# Altium PCB LR1121EVM.PcbDoc
Units mm, origin at the board's own origin, x right, y up, seen from the top; angles counter-clockwise.
Board outline 90 x 62 mm, 2 copper layers (Top Layer, Bottom Layer), stack 1.571 mm thick; 50 components, 49 nets, 232 pads, 447 vias.
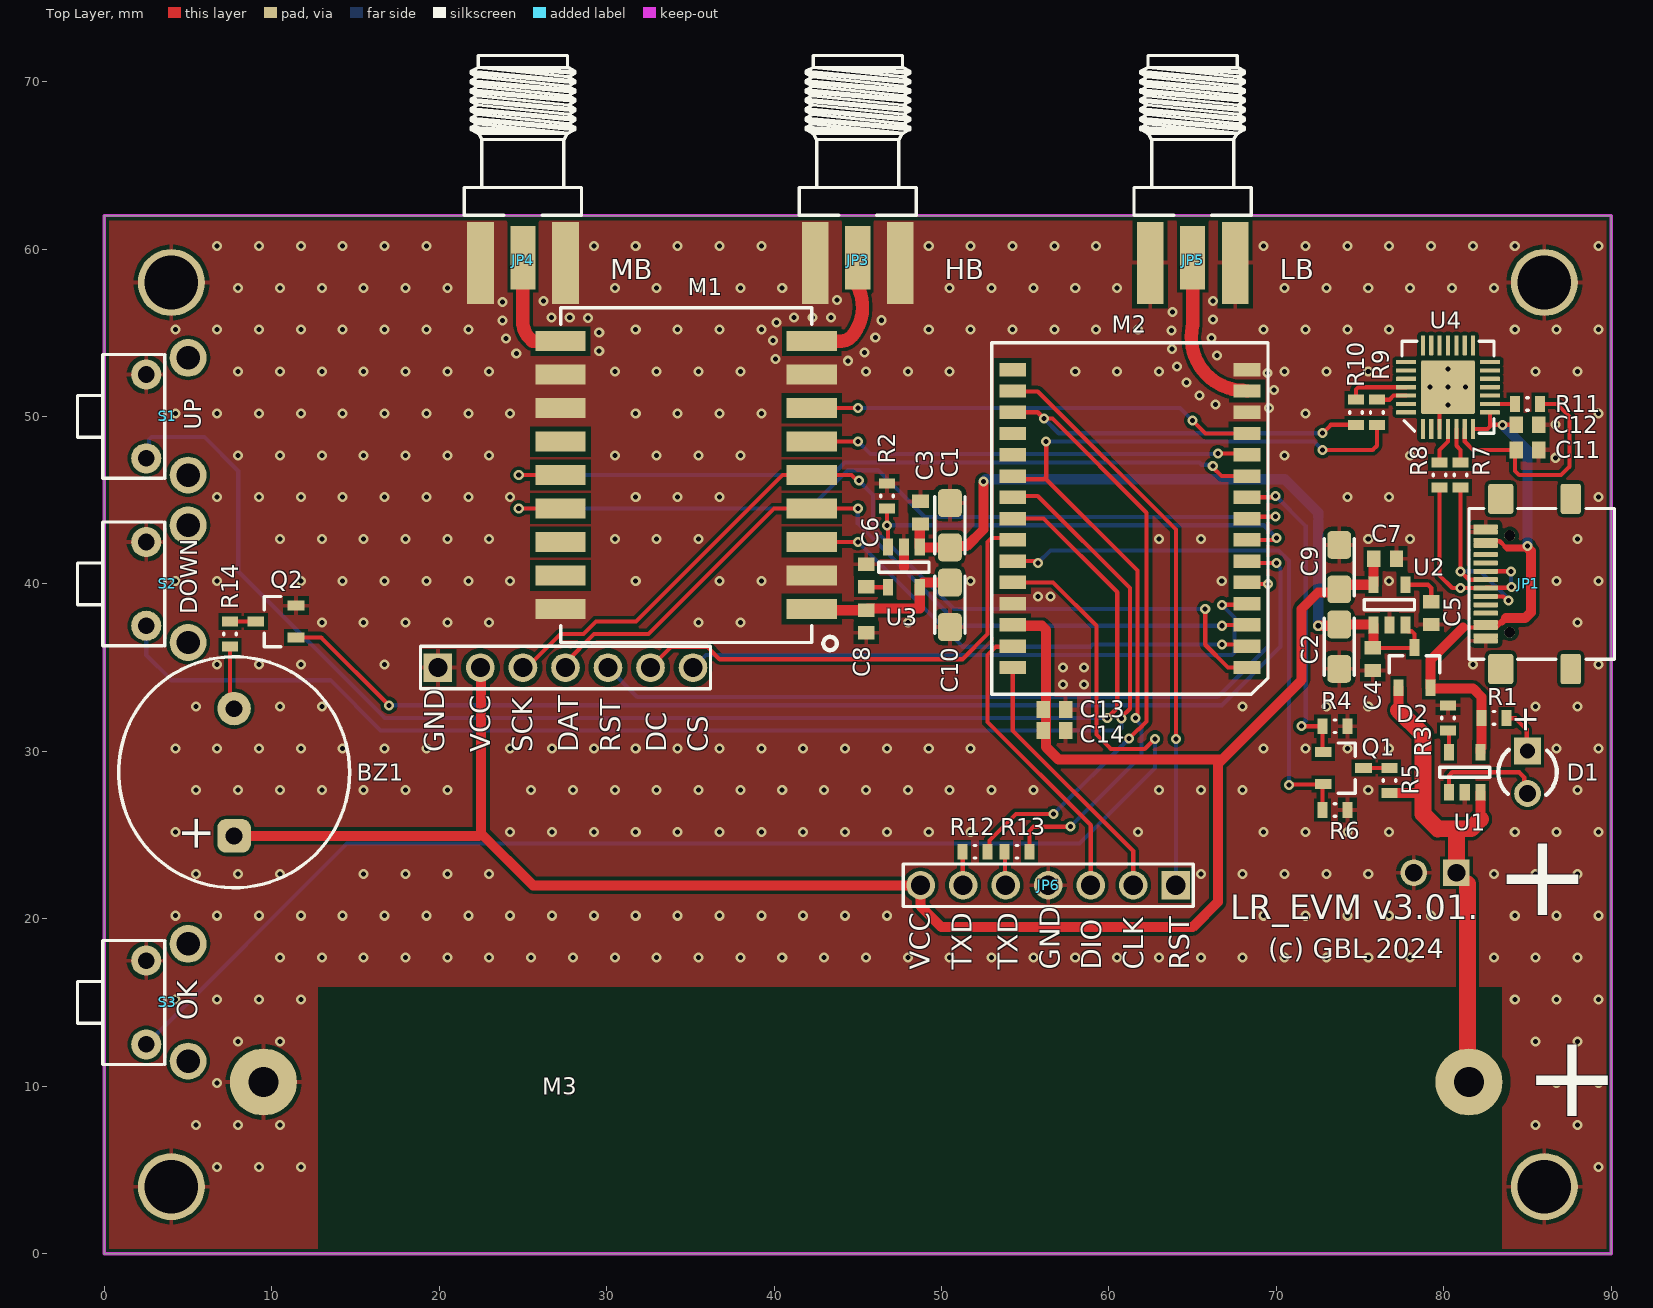
[diagram p0: Top Layer view]
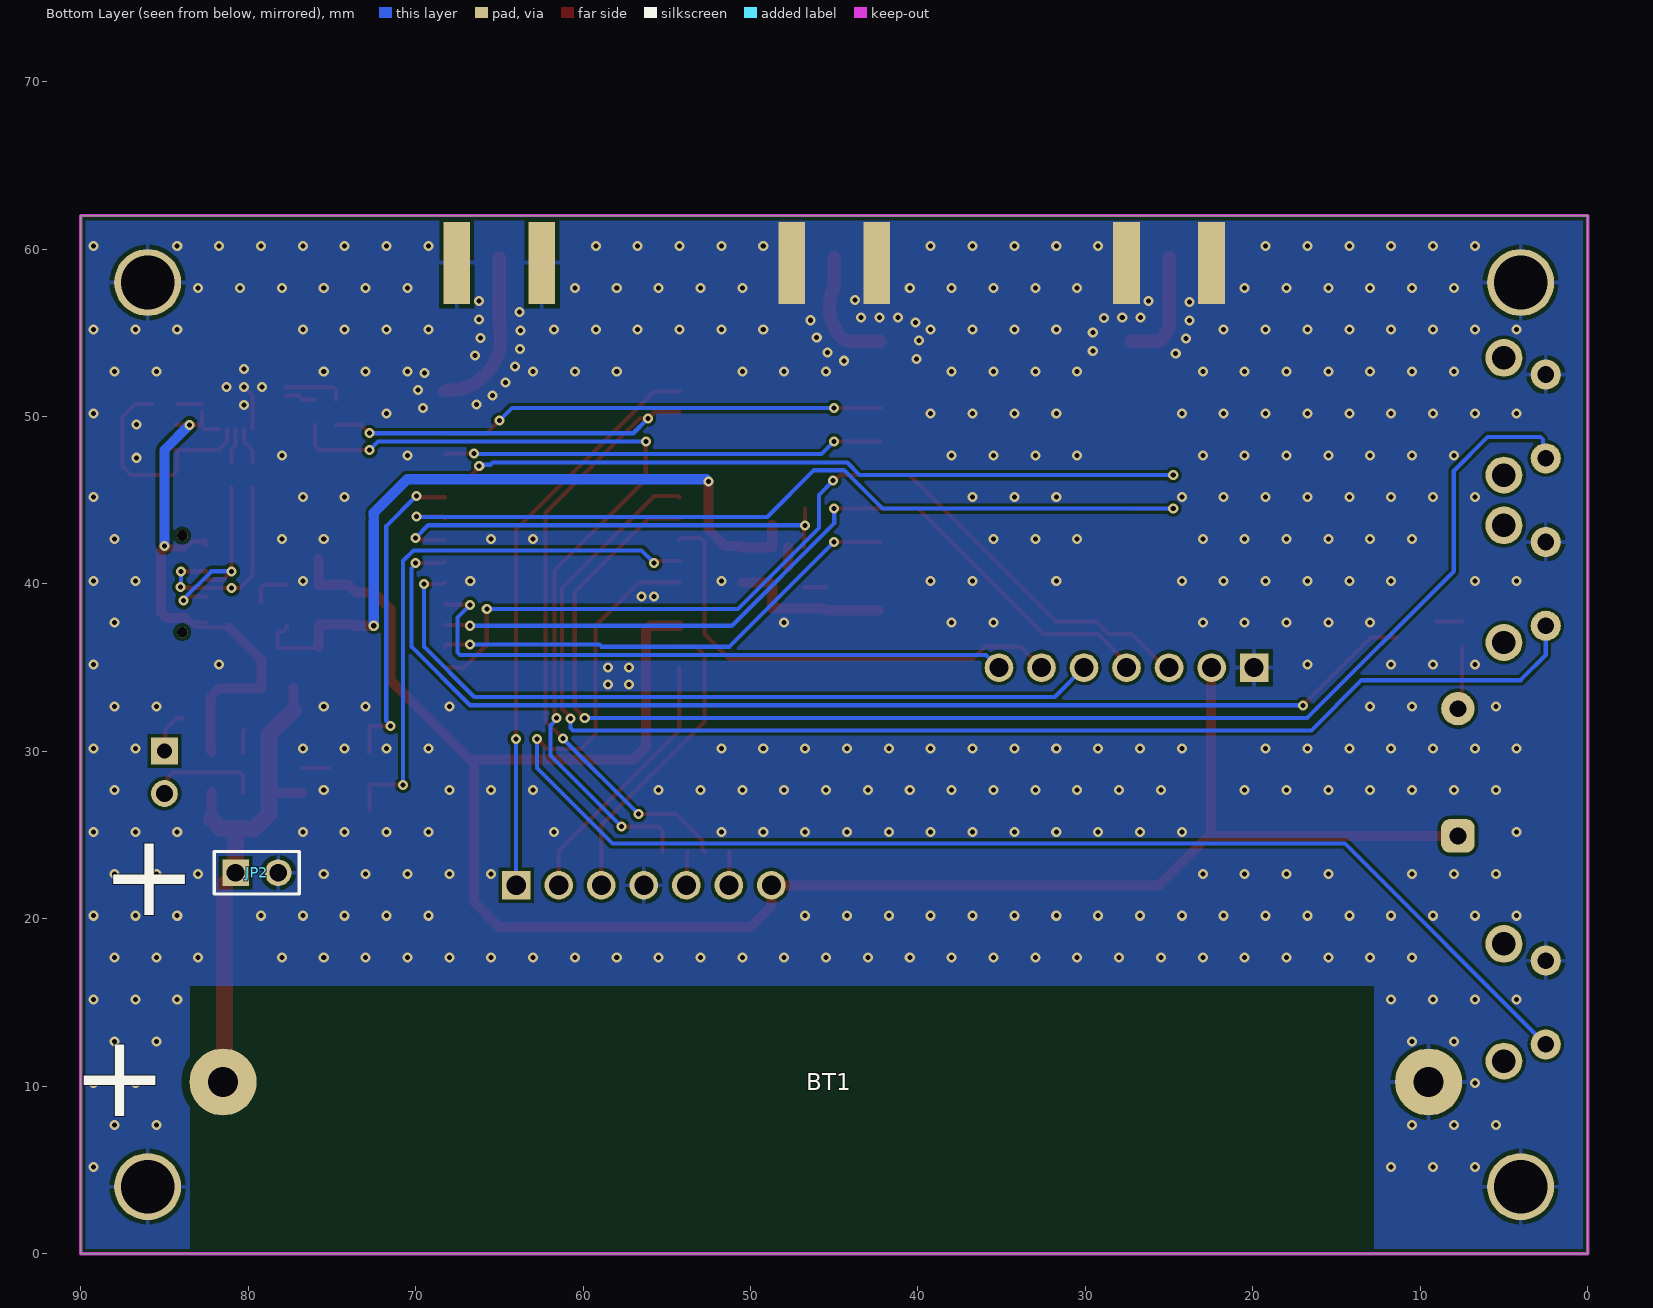
[diagram p1: Bottom Layer view, seen from below]
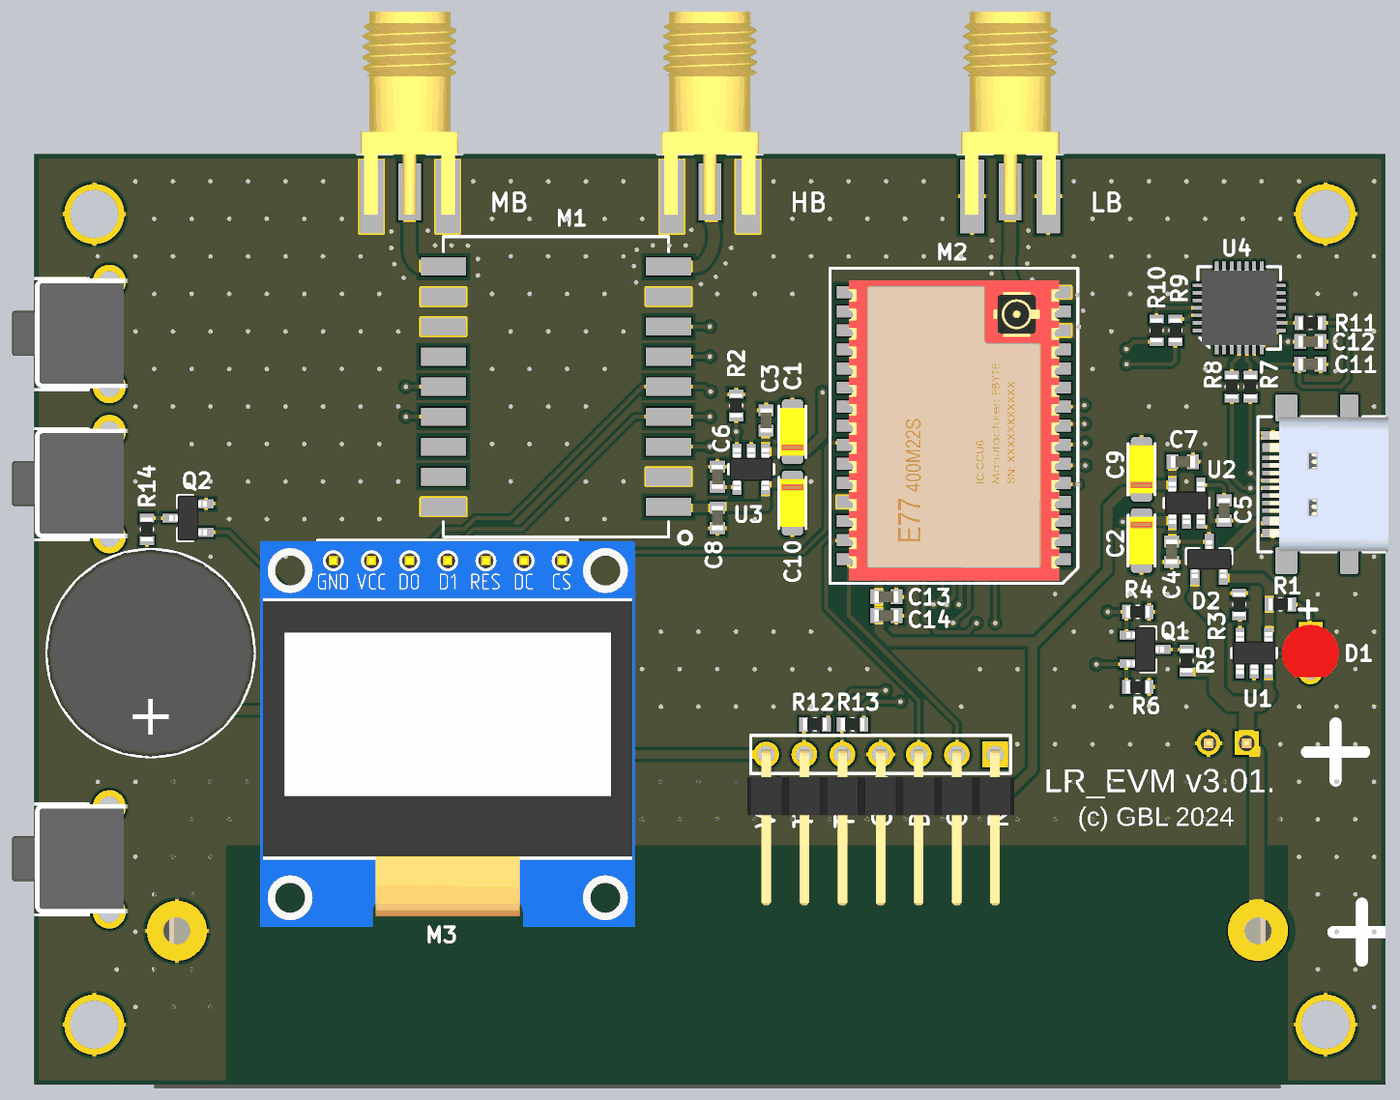
[diagram p2: 3D render of the assembled board from above, using the file's embedded part models]

## Layer stack, top to bottom
Top Solder: solder mask 0.0102, Solder Resist, Dk 3.5
Top Layer: signal copper 0.0356
Dielectric 1: dielectric 1.5, FR-4, Dk 4.8
Bottom Layer: signal copper 0.0356
Bottom Solder: solder mask 0.0102, Solder Resist, Dk 3.5

## Board outline
0,0 0,62 90,62 90,0

## Design rules (kind name [scope] priority, off if disabled: settings)
Clearance Clearance_2 [InNamedPolygon('GND_L01_P005') Or InNamedPolygon('GND_L01_P006') Or InNamedPolygon('GND_L02_P002') Or InNamedPolygon('GND_L02_P003') vs InNet('VBAT')] p1: gap=0.5 ignorepadtopadclearanceinfootprint=FALSE
Clearance Clearance_1 [InNamedPolygon('GND_L01_P001') vs InComponent('M1') or InComponent('M2') or InComponent('M3')] p2: gap=0.3 ignorepadtopadclearanceinfootprint=FALSE
Clearance [All] p3: gap=0.2 ignorepadtopadclearanceinfootprint=FALSE
HoleSize [All] p1: absolutevalues=TRUE maxlimit=5 minlimit=0.025 maxpercent=80.000 minpercent=20.000
MinimumSolderMaskSliver [All] p1: minsoldermaskwidth=0.02
PolygonConnect PolygonConnect_5 [All vs IsNamedPolygon('GND_L01_P005') Or IsNamedPolygon('GND_L01_P006') Or IsNamedPolygon('GND_L02_P002') Or IsNamedPolygon('GND_L02_P003')] p1: thpad.connectstyle=Relief thpad.reliefconductorwidth=0.254 thpad.reliefentries=4 thpad.polygonreliefangle="90 Angle" thpad.airgapwidth=0.254 smdpad.connectstyle=Relief smdpad.reliefconductorwidth=0.254 smdpad.reliefentries=4 smdpad.polygonreliefangle="90 Angle" smdpad.airgapwidth=0.254 via.connectstyle=Direct via.reliefconductorwidth=0.254 via.reliefentries=4 via.polygonreliefangle="90 Angle" via.airgapwidth=0.254
PolygonConnect PolygonConnect_4 [InComponent('JP3') or InComponent('JP4') or InComponent('JP7') vs IsNamedPolygon('GND_L02_P000')] p2: thpad.connectstyle=Relief thpad.reliefconductorwidth=0.254 thpad.reliefentries=4 thpad.polygonreliefangle="90 Angle" thpad.airgapwidth=0.254 smdpad.connectstyle=Direct smdpad.reliefconductorwidth=0.254 smdpad.reliefentries=4 smdpad.polygonreliefangle="90 Angle" smdpad.airgapwidth=0.254 via.connectstyle=Relief via.reliefconductorwidth=0.254 via.reliefentries=4 via.polygonreliefangle="90 Angle" via.airgapwidth=0.254
PolygonConnect PolygonConnect_2 [InComponent('JP3') or InComponent('JP4') or InComponent('JP7') or InComponent('M1') or InComponent('M2') or InComponent('M3') vs IsNamedPolygon('GND_L01_P001')] p3: thpad.connectstyle=Relief thpad.reliefconductorwidth=0.254 thpad.reliefentries=4 thpad.polygonreliefangle="90 Angle" thpad.airgapwidth=0.254 smdpad.connectstyle=Direct smdpad.reliefconductorwidth=0.254 smdpad.reliefentries=4 smdpad.polygonreliefangle="90 Angle" smdpad.airgapwidth=0.254 via.connectstyle=Relief via.reliefconductorwidth=0.254 via.reliefentries=4 via.polygonreliefangle="90 Angle" via.airgapwidth=0.254
PolygonConnect PolygonConnect_3 [InComponent('C17')or InComponent('C18') or InComponent('C20') or InComponent('C19') vs IsNamedPolygon('GND_L01_P001')] p4: thpad.connectstyle=Relief thpad.reliefconductorwidth=0.254 thpad.reliefentries=4 thpad.polygonreliefangle="90 Angle" thpad.airgapwidth=0.254 smdpad.connectstyle=Direct smdpad.reliefconductorwidth=0.254 smdpad.reliefentries=4 smdpad.polygonreliefangle="90 Angle" smdpad.airgapwidth=0.254 via.connectstyle=Relief via.reliefconductorwidth=0.254 via.reliefentries=4 via.polygonreliefangle="90 Angle" via.airgapwidth=0.254
PolygonConnect PolygonConnect_1 [All vs IsNamedPolygon('GND_L01_P001') Or IsNamedPolygon('GND_L02_P000')] p5: thpad.connectstyle=Relief thpad.reliefconductorwidth=0.254 thpad.reliefentries=4 thpad.polygonreliefangle="90 Angle" thpad.airgapwidth=0.254 smdpad.connectstyle=Relief smdpad.reliefconductorwidth=0.254 smdpad.reliefentries=4 smdpad.polygonreliefangle="90 Angle" smdpad.airgapwidth=0.254 via.connectstyle=Direct via.reliefconductorwidth=0.254 via.reliefentries=4 via.polygonreliefangle="90 Angle" via.airgapwidth=0.254
PolygonConnect [All] p6: connectstyle=Relief reliefconductorwidth=0.254 reliefentries=4 polygonreliefangle="90 Angle" airgapwidth=0.254
RoutingVias [All] p1: holewidth=0.711 width=1.27 viastyle="Through Hole" minholewidth=0.711 minwidth=1.27 maxholewidth=0.711 maxwidth=1.27
SilkToSilkClearance [All] p1: silktosilkclearance=0.05
SilkToSolderMaskClearance [IsPad] p1: minsilkscreentomaskgap=0.02 clearancetoexposedcopper=TRUE
SolderMaskExpansion [All] p1: expansion=0.102 istentingtop=FALSE
Width [All] p1: maxlimit=3 minlimit=0.15 preferedwidth=0.25
26 further rules are at their usual default settings.

## Components (designator, comment, footprint, x,y, rotation, side; value= is the part's Value field where it differs from the comment)
BT1 "18650" 18650 45.5,10.25 r180 bottom
BZ1 "AZ-14M40" AZ-14M40 7.75,28.75 r90 top value={Value}
C1 "22u" C_TANTAL_A 50.5,43.5 r90 top
C2 "22u" C_TANTAL_A 73.75,36.25 r270 top
C3 "100n" C-0603 48.75,44.25 r90 top
C4 "100n" C-0603 75.75,35.5 r270 top
C5 "nc" C-0603 79.25,38.25 r270 top
C6 "nc" C-0603 45.5,40.5 r90 top
C7 "100n" C-0603 76.5,41.5 r0 top
C8 "100n" C-0603 45.5,37.75 r270 top
C9 "22u" C_TANTAL_A 73.75,41 r90 top
C10 "22u" C_TANTAL_A 50.5,38.75 r270 top
C11 "100n" C-0603 85,48 r0 top
C12 "100n" C-0603 85,49.5 r180 top
C13 "1n" C-0603 56.75,32.5 r0 top
C14 "1u" C-0603 56.75,31.25 r0 top
D1 "DLED" LED_3mm_RED 85,28.75 r270 top
D2 "BAT54C" SOT-23 78.25,35 r90 top
JP1 "L-KLS1-5473" L-KLS1-5473 82.5,40 r90 top
JP2 "HEADER 2" PLS1-2 80.75,22.75 r180 bottom
JP3 "EM-SA071-GGT" SMA_F_EDGE 45,60.75 r270 top
JP4 "EM-SA071-GGT" SMA_F_EDGE 25,60.75 r270 top
JP5 "EM-SA071-GGT" SMA_F_EDGE 65,60.75 r270 top
JP6 "Header 7" PLS1-7R 63.99,22 r180 top
M1 "LORA1121" LORA1121 34.75,46.5 r180 top locked
M2 "E77-400M22S" E77XX-M22 61.25,43.9 r180 top locked
M3 "OLED0_96" OLED096 19.92,35 r0 top
Q1 "MOSF-N" SOT-23 74,29 r0 top
Q2 "MMUN2211" SOT-23 10.25,37.75 r180 top
R1 "RES" R-0603 83,32 r0 top
R2 "100k" R-0603 46.75,45.25 r90 top
R3 "2k" R-0603 80.25,32 r270 top
R4 "1M" R-0603 73.5,31.5 r0 top
R5 "100k" R-0603 76.75,28.25 r90 top
R6 "10k" R-0603 73.5,26.5 r0 top
R7 "22" R-0603 81,46.5 r270 top
R8 "22" R-0603 79.75,46.5 r270 top
R9 "1k" R-0603 76,50.25 r90 top
R10 "1k" R-0603 74.75,50.25 r90 top
R11 "10k" R-0603 85,50.75 r180 top
R12 "1k" R-0603 52,24 r0 top
R13 "1k" R-0603 54.5,24 r0 top
R14 "RES" R-0603 7.5,37 r90 top
S1 "KLS7-TS3602 -3 15-180" KLS7-TS3602 2.5,50 r270 top locked
S2 "KLS7-TS3602 -3 15-180" KLS7-TS3602 2.5,40 r270 top locked
S3 "KLS7-TS3602 -3 15-180" KLS7-TS3602 2.5,15 r270 top locked
U1 "MCP73831-2ATI/OT" SOT-23-5 81.25,28.75 r90 top
U2 "NCP551SN33LT1G" SOT-23-5 76.75,38.75 r90 top
U3 "NCP551SN33LT1G" SOT-23-5 47.75,41 r270 top
U4 "CP2102" QFN28 80.25,51.75 r90 top value={Value}

## Footprints (in the part's own frame and the unit in brackets; to place one, negate y for a bottom-side part, rotate by r counter-clockwise, add the part's x,y. Pads: shape width x height; smd on the part's side, far side on the other; paste and mask are expansions set on the pad)
18650 [mm]
  round 4 hole 1.8: 1(-36,0) 2(36,0)
  body extent -37.5,-10.5 37.5,10.5, height 21
AZ-14M40 [mm]
  rrect50% 2x2 hole 1: 1(-3.8,0)
  round 2 hole 1: 2(3.8,0)
  silkscreen extent -6.9,-6.9 6.9,6.9, body extent -6.89,-6.9 6.89,6.9, height 4.8
C-0603 [mm] "Chip Capacitor, 2-Leads, Body 1,60x0,80mm, IPC Medium Density"
  rect 0.8x1 smd: 1(-0.675,0) 2(0.675,0)
  body extent -0.8,-0.4 0.8,0.4, height 0.8
C_TANTAL_A [mm] "Capacitor, Polarized, Molded Body; 3.20 mm L X 1.65 mm W X 1.80 mm H body"
  rrect35% 1.66x1.42 smd: 1(1.325,0) 2(-1.325,0)
  silkscreen extent -1.7,-0.9 1.7,0.9, body extent -1.6,-0.82 1.6,0.82, height 1.8
E77XX-M22 [mm]
  rect 1.6x0.8 smd: 1(-7,8.89) 2(-7,7.62) 3(-7,6.35) 4(-7,5.08) 5(-7,3.81) 6(-7,2.54) 7(-7,1.27) 8(-7,0) 9(-7,-1.27) 10(-7,-2.54) 11(-7,-3.81) 12(-7,-5.08) 13(-7,-6.35) 14(-7,-7.62) 15(-7,-8.89) 16(7,-8.89) 17(7,-7.62) 18(7,-6.35) 19(7,-5.08) 20(7,-3.81) 21(7,-2.54) 22(7,-1.27) 23(7,0) 24(7,1.27) 25(7,2.54) 26(7,3.81) 27(7,5.08) 28(7,6.35) 29(7,7.62) 30(7,8.89)
  silkscreen extent -8.25,-10.5 8.25,10.5, body extent -7,-9.68 7,10.3, height 2.7
KLS7-TS3602 [mm] "miniature switch"
  round 1.8 hole 1: 1(-2.5,0) 2(2.5,0)
  oval 2.25x2.2 hole 1.4: 3(-3.5,2.5)
  round 2.2 hole 1.4: 3(3.5,2.5)
  silkscreen extent -3.7,-4.1 3.7,1.1, body extent -3.7,-3.97 3.6,3.75, height 4.4
L-KLS1-5473 [mm] "USB 3.1 Type C"
  rrect20% 1.8x1.2 smd mask+0.07: 1(-5.08,-5.08) 1(5.08,-5.08)
  rrect20% 1.8x1.5 smd mask+0.07: 1(-5.08,-0.9) 1(5.08,-0.9)
  rrect30% 0.3x1.45 smd paste-2 mask+0.07: A1(-3.1,0) A4(-2.6,0) A9(2.6,0) A12(3.4,0) B1(3.1,0) B4(2.3,0) B9(-2.3,0) B12(-3.4,0)
  rrect30% 0.3x1.45 smd mask+0.07: A5(-1.25,0) A6(-0.25,0) A7(0.25,0) A8(1.25,0) B5(1.75,0) B6(0.75,0) B7(-0.75,0) B8(-1.75,0)
  round 0.65 hole 0.65 unplated paste-2539.97 mask+0.07: MH(-2.885,-1.44) MH(2.885,-1.44)
  silkscreen extent -4.5,-7.69 4.5,1, body extent -4.47,-7.7 4.47,0.2, height 3.2
LED_3mm_RED [mm]
  rect 1.6x1.6 hole 0.9: 1(-1.27,0)
  round 1.6 hole 1: 2(1.27,0)
  silkscreen extent -1.34,-1.75 1.34,1.75, body extent -1.9,-1.9 1.6,1.9, height 5.75
LORA1121 [mm]
  rect 3x1.2 smd: 1(-7.5,8) 2(-7.5,6) 3(-7.5,4) 4(-7.5,2) 5(-7.5,0) 6(-7.5,-2) 7(-7.5,-4) 8(-7.5,-6) 9(-7.5,-8) 10(7.5,-8) 11(7.5,-6) 12(7.5,-4) 13(7.5,-2) 14(7.5,0) 15(7.5,2) 16(7.5,4) 17(7.5,6) 18(7.5,8)
  silkscreen extent -8.99,-10 7.5,10.46, body extent -7.5,-10 7.5,10, height 2
OLED096 [mm] "Header, Vertical, 2.54 mm pitch; 0.70 mm lead width, 7 pins, 1 row, 7 pins per row, 16.51 mm L X 2.54 mm W X 7.54 mm H body"
  rect 1.71x1.71 hole 1.14 paste-2539.97: 1(0,0)
  round 1.71 hole 1.14 paste-2539.97: 2(2.54,0) 3(5.08,0) 4(7.62,0) 5(10.16,0) 6(12.7,0) 7(15.24,0)
  silkscreen extent -1.04,-1.27 16.28,1.27, body extent -4.88,-24.5 20.12,1.2, height 6.54
PLS1-2 [mm] "Header, Vertical, 2.54 mm pitch; 0.64 mm lead width, 2 pins, 1 row, 2 pins per row, 5.08 mm L X 2.54 mm W X 8.54 mm H body"
  rect 1.59x1.59 hole 1.06 paste-2539.97: 1(0,0)
  round 1.59 hole 1.06 paste-2539.97: 2(2.54,0)
  silkscreen extent -1.27,-1.27 3.81,1.27, body extent -1.27,-1.27 3.81,1.27, height 8.54
PLS1-7R [mm] "Header, Vertical, 2.54 mm pitch; 0.70 mm lead width, 7 pins, 1 row, 7 pins per row, 16.51 mm L X 2.54 mm W X 7.54 mm H body"
  rect 1.71x1.71 hole 1.14 paste-2539.97: 1(0,0)
  round 1.71 hole 1.14 paste-2539.97: 2(2.54,0) 3(5.08,0) 4(7.62,0) 5(10.16,0) 6(12.7,0) 7(15.24,0)
  silkscreen extent -1.04,-1.27 16.28,1.27, body extent -1.27,-0.32 16.51,10.04, height 2.54
QFN28 [mm]
  rrect20% 1.2x0.25 smd: 1(-2.5,1.5) 2(-2.5,1) 3(-2.5,0.5) 4(-2.5,0) 5(-2.5,-0.5) 6(-2.5,-1) 7(-2.5,-1.5) 15(2.5,-1.5) 16(2.5,-1) 17(2.5,-0.5) 18(2.5,0) 19(2.5,0.5) 20(2.5,1) 21(2.5,1.5)
  rrect20% 0.25x1.2 smd: 8(-1.5,-2.5) 9(-1,-2.5) 10(-0.5,-2.5) 11(0,-2.5) 12(0.5,-2.5) 13(1,-2.5) 14(1.5,-2.5) 22(1.5,2.5) 23(1,2.5) 24(0.5,2.5) 25(0,2.5) 26(-0.5,2.5) 27(-1,2.5) 28(-1.5,2.5)
  rrect5% 3.2x3.2 smd paste-4: 29(0,0)
  silkscreen extent -2.75,-2.75 2.75,2.75, body extent -2.5,-2.5 2.5,2.5, height 1
R-0603 [mm] "Chip Resistor, 2-Leads, Body 1,60x0,82mm, IPC Medium Density"
  rect 0.6x0.95 smd: 1(-0.75,0) 2(0.75,0)
  silkscreen extent -0.05,-0.38 0.05,0.38, body extent -0.8,-0.4 0.8,0.4, height 0.45
SMA_F_EDGE [mm] "SMA End Launch Jack for 1.58mm PCB, 50 Ohm, Flat Tab Contact"
  rect 3.81x1.5 smd: 1(1.27,0)
  rect 4.9x1.6 smd: 2(1.575,2.54) 2(1.575,-2.54)
  rect 4.9x1.6 smd far side: 2(1.575,2.54) 2(1.575,-2.54)
  silkscreen extent -10.81,-3.5 -1.28,3.5, body extent -10.73,-3.25 2.77,3.25, height 3.7
SOT-23 [mm]
  rect 1x0.6 smd: 1(-1.2,0.95) 2(-1.2,-0.95) 3(1.2,0)
  silkscreen extent -0.3,-1.5 0.7,1.5, body extent -1.25,-1.5 1.25,1.5, height 1.2
SOT-23-5 [mm] "SOT23, 5-Leads, Body 2,90x2,45mm, Pitch 0,95mm, IPC Medium Density"
  rect 1x0.6 smd: 1(-1.2,0.95) 2(-1.2,0) 3(-1.2,-0.95) 4(1.2,-0.95) 5(1.2,0.95)
  silkscreen extent -0.3,-1.5 0.3,1.5, body extent -1.4,-1.45 1.4,1.45, height 1.55

## Part data
BT1: library part Battery, "Multicell Battery", LatestRevisionDate=17-Jul-2002, LatestRevisionNote="Re-released for DXP Platform.", PackageDescription="Battery; 2 Leads", PackageReference=BAT-2, Published=24-Mar-1999, Publisher="Altium Limited"
BZ1: library part BUZ-AZ-14M40, Mounting  Method=THT
C1 C2 C9 C10: library part CAPP, Voltage=16V, Вид=Конденсатор
C3 C4 C5 C6 C7 C8 C11 C12 C13 C14: library part CAPN, Voltage=50V, Вид=Конденсатор, Точність/група=NP0
JP3 JP4 JP5: library part SMA, "SMA Female R/A PCB Mount", Вид=Роз'єм
JP6: "Header, 7-Pin", LatestRevisionDate=17-Jul-2002, LatestRevisionNote="Re-released for DXP Platform.", Publisher="Altium Limited"
R2 R3 R4 R5 R6 R7 R8 R9 R10 R11 R12 R13: library part RES, Вид=Резистор, Точність/група=5%
S1 S2 S3: library part SW-1, Вид=Кнопка
U1: library part MCP73831
U2 U3: library part LP2980, "50mA Low-Dropout Regulator", Вид=Мікросхема
D1: Вид=Світлодіод
D2: Вид=Діод
JP1 U4: Mounting  Method=SMD
JP2: Вид=Роз'єм
Q1 Q2: Вид=Транзистор
R1 R14: Вид=Резистор, Точність/група=5%

## Free pads (board coordinates)
  round 4 hole 3.2: 0(4,4) 0(4,58) 0(86,4) 0(86,58)

## Via types
v1: diameter 0.6, hole 0.3, Top Layer to Bottom Layer, tented both sides, 431 vias
v2: diameter 0.6, hole 0.3, Top Layer to Bottom Layer, tented bottom, 11 vias
v3: diameter 0.6, hole 0.3, Top Layer to Bottom Layer, 5 vias

## Nets (pads, with @x,y where several pads share a name; then routed paths per layer and width w, separated by ;. In a path a pad name is that pad's centre, name@x,y a point inside that pad or via, vN(x,y) a via of type N, cw(c..) or ccw(c..) an arc to the next point about the centre after c; other vN are vias at no path point)
\: M2.26 S3.2 | length 85.5
  Top Layer w0.25: M2.26 56.66,40.09 59.25,37.5 59.25,31 60.113,30.137 62.137,30.137 v1(62.75,30.75)
  Bottom Layer w0.25: S3.2 14.5,24.5 58.25,24.5 62.75,29 v1(62.75,30.75)
BATT_LEVEL: M2.25 Q1.2 R6.1 | length 34.3
  Top Layer w0.25: M2.25 55.64,41.36 v1(55.75,41.25) ; v1(70.75,28) 70.775,28.025 Q1.2@72.775,28.025 ; Q1.2@72.6,28.05 Q1.2 Q1.2@72.775,28.025 ; R6.1 72.75,28 Q1.2@72.775,28.025
  Bottom Layer w0.25: v1(55.75,41.25) 56.5,42 70.134,42 70.75,41.384 v1(70.75,28)
BATT_MEAS: M2.9 Q1.1 R4.1 | length 19.2
  Top Layer w0.25: M2.9 69.92,45.17 v1@70,45.25 ; v1(71.5,31.5) R4.1 72.75,30 Q1.1
  Bottom Layer w0.25: v1(69.948,45.262) 71.75,43.46 71.75,31.821 71.5,31.571 v1(71.5,31.5)
BUSY1121: M1.7 M2.12 | length 26.6
  Top Layer w0.25: M1.7 v2(45,50.5) ; v1(65,49.75) 65.77,48.98 M2.12
  Bottom Layer w0.25: v2(45,50.5) 64.25,50.5 v1(65,49.75)
BUZZ: M2.6 Q2.1 | length 68.8
  Top Layer w0.25: Q2.1 12.95,36.8 v1(17,32.75) ; M2.6 68.36,41.25 v2(70,41.25)
  Bottom Layer w0.25: v1(17,32.75) 66.75,32.75 70.25,36.25 70.25,40.929 70,41.179 v2(70,41.25)
DM: JP1.A7 JP1.B7 R7.2 | length 11.8
  Top Layer w0.25: R7.2 v1(81,40.75) 81.5,40.25 JP1.A7 ; JP1.B7 83.551,39.25 83.805,38.997 v1(83.86,38.997)
  Bottom Layer w0.25: v1(81,40.75) 82.2,40.75 83.86,39.09 v1(83.86,38.997)
DOWN: M2.22 S2.2 | length 79.8
  Top Layer w0.25: M2.22 54.33,45.25 55.75,45.25 61.25,39.75 61.25,32.545 60.753,32.049 v1(60.753,31.97)
  Bottom Layer w0.25: S2.2 2.5,35.75 4,34.25 13.5,34.25 16.497,31.253 60.607,31.253 60.753,31.4 v1(60.753,31.97)
DP: JP1.A6 JP1.B6 R8.2 | length 12.3
  Top Layer w0.25: R8.2 79.75,40.5 80.5,39.75 v1(81,39.75) JP1.A6 82.523,39.773 83.993,39.773 v1(84.03,39.811) ; JP1.B6 v1(84,40.75)
  Bottom Layer w0.25: v1(84,40.75) 84.015,40.735 84.015,39.826 v1(84.03,39.811)
EN1121: M2.7 R2.1 U3.3 | length 27.6
  Top Layer w0.25: v1(46.75,43.5) R2.1 ; U3.3 v1@46.8,43.45 ; M2.7 69.88,42.63 v1(70,42.75)
  Bottom Layer w0.25: v1(46.75,43.5) 69.25,43.5 v1(70,42.75)
GND: BT1.2 C1.1 C2.1 C3.2 C4.2 C5.2 C6.2 C7.2 C8.2 C9.1 C10.1 C11.2 C12.1 C13.2 C14.2 JP1.A1 JP1.A12 JP1.B1 JP1.B12 JP2.2 JP3.2 JP4.2 JP5.2 JP6.4 M1.2 M1.8 M1.11 M1.12 M1.18 M2.13 M2.15 M2.27 M3.1 pad.0 Q2.2 R2.2 R3.1 R4.2 R6.2 S1.1 S2.1 S3.1 U1.2 U2.2 U3.2 U4.3 U4.29 | length 3.9
  Top Layer w0.25: U4.3 79.75,51.25 v3(80.25,51.75)
  Top Layer w0.6: 47.75,41 U3.2
  other v1: 6.737,5.181 9.237,5.181 11.737,5.181 89.237,5.181 5.487,7.681 7.987,7.681 10.487,7.681 85.487,7.681 87.987,7.681 6.737,10.181 86.737,10.181 89.237,10.181 7.987,12.681 10.487,12.681 85.487,12.681 87.987,12.681 4.237,15.181 6.737,15.181 9.237,15.181 11.737,15.181 84.237,15.181 86.737,15.181 89.237,15.181 10.487,17.681 12.987,17.681 15.487,17.681 17.987,17.681 20.487,17.681 22.987,17.681 25.487,17.681 27.987,17.681 30.487,17.681 32.987,17.681 35.487,17.681 37.987,17.681 40.487,17.681 42.987,17.681 45.487,17.681 47.987,17.681 50.487,17.681 52.987,17.681 55.487,17.681 57.987,17.681 60.487,17.681 62.987,17.681 65.487,17.681 67.987,17.681 70.487,17.681 72.987,17.681 75.487,17.681 77.987,17.681 82.987,17.681 85.487,17.681 87.987,17.681 4.237,20.181 6.737,20.181 9.237,20.181 11.737,20.181 14.237,20.181 16.737,20.181 19.237,20.181 21.737,20.181 24.237,20.181 26.737,20.181 29.237,20.181 31.737,20.181 34.237,20.181 36.737,20.181 39.237,20.181 41.737,20.181 44.237,20.181 46.737,20.181 69.237,20.181 71.737,20.181 74.237,20.181 76.737,20.181 79.237,20.181 84.237,20.181 86.737,20.181 89.237,20.181 5.487,22.681 7.987,22.681 10.487,22.681 15.487,22.681 17.987,22.681 20.487,22.681 22.987,22.681 65.487,22.681 67.987,22.681 70.487,22.681 72.987,22.681 75.487,22.681 82.987,22.681 85.487,22.681 87.987,22.681 4.237,25.181 24.237,25.181 26.737,25.181 29.237,25.181 31.737,25.181 34.237,25.181 36.737,25.181 39.237,25.181 41.737,25.181 44.237,25.181 46.737,25.181 49.237,25.181 51.737,25.181 61.737,25.181 69.237,25.181 71.737,25.181 74.237,25.181 76.737,25.181 84.237,25.181 86.737,25.181 89.237,25.181 5.487,27.681 7.987,27.681 10.487,27.681 12.987,27.681 15.487,27.681 17.987,27.681 20.487,27.681 25.487,27.681 27.987,27.681 30.487,27.681 32.987,27.681 35.487,27.681 37.987,27.681 40.487,27.681 42.987,27.681 45.487,27.681 47.987,27.681 50.487,27.681 52.987,27.681 55.487,27.681 62.987,27.681 65.487,27.681 67.987,27.681 75.487,27.681 87.987,27.681 4.237,30.181 6.737,30.181 9.237,30.181 11.737,30.181 14.237,30.181 16.737,30.181 19.237,30.181 24.237,30.181 26.737,30.181 29.237,30.181 31.737,30.181 34.237,30.181 36.737,30.181 39.237,30.181 41.737,30.181 44.237,30.181 46.737,30.181 49.237,30.181 51.737,30.181 69.237,30.181 71.737,30.181 74.237,30.181 76.737,30.181 86.737,30.181 89.237,30.181 5.487,32.681 10.487,32.681 12.987,32.681 67.987,32.681 72.987,32.681 75.487,32.681 85.487,32.681 87.987,32.681 57.25,34 58.5,34 57.25,35 58.5,35 6.737,35.181 9.237,35.181 11.737,35.181 16.737,35.181 81.737,35.181 89.237,35.181 12.987,37.681 15.487,37.681 17.987,37.681 20.487,37.681 22.987,37.681 35.487,37.681 37.987,37.681 47.987,37.681 87.987,37.681 55.75,39.25 56.5,39.25 4.237,40.181 6.737,40.181 11.737,40.181 14.237,40.181 16.737,40.181 19.237,40.181 21.737,40.181 24.237,40.181 31.737,40.181 36.737,40.181 39.237,40.181 51.737,40.181 66.737,40.181 76.737,40.181 86.737,40.181 89.237,40.181 10.487,42.681 12.987,42.681 15.487,42.681 17.987,42.681 20.487,42.681 22.987,42.681 30.487,42.681 32.987,42.681 35.487,42.681 62.987,42.681 65.487,42.681 75.487,42.681 77.987,42.681 87.987,42.681 6.737,45.181 9.237,45.181 11.737,45.181 14.237,45.181 16.737,45.181 19.237,45.181 21.737,45.181 24.237,45.181 31.737,45.181 34.237,45.181 36.737,45.181 74.237,45.181 76.737,45.181 89.237,45.181 86.657,47.533 7.987,47.681 10.487,47.681 12.987,47.681 15.487,47.681 17.987,47.681 20.487,47.681 22.987,47.681 30.487,47.681 32.987,47.681 35.487,47.681 37.987,47.681 70.487,47.681 77.987,47.681 86.657,49.533 4.237,50.181 6.737,50.181 9.237,50.181 11.737,50.181 14.237,50.181 16.737,50.181 19.237,50.181 21.737,50.181 24.237,50.181 31.737,50.181 34.237,50.181 36.737,50.181 39.237,50.181 71.737,50.181 89.237,50.181 69.57,50.51 66.356,50.704 65.407,51.259 69.857,51.572 64.628,52.037 69.474,52.603 7.987,52.681 10.487,52.681 12.987,52.681 15.487,52.681 17.987,52.681 20.487,52.681 22.987,52.681 30.487,52.681 32.987,52.681 35.487,52.681 37.987,52.681 45.487,52.681 47.987,52.681 50.487,52.681 57.987,52.681 60.487,52.681 62.987,52.681 70.487,52.681 72.987,52.681 75.487,52.681 85.487,52.681 87.987,52.681 64.071,52.985 44.408,53.327 40.091,53.445 66.461,53.649 24.602,53.753 45.389,53.825 29.557,53.908 63.76,54.04 39.943,54.535 23.98,54.661 46.043,54.71 66.133,54.699 29.557,55.008 63.73,55.14 4.237,55.181 6.737,55.181 9.237,55.181 11.737,55.181 14.237,55.181 16.737,55.181 19.237,55.181 21.737,55.181 31.737,55.181 34.237,55.181 36.737,55.181 39.237,55.181 49.237,55.181 51.737,55.181 54.237,55.181 56.737,55.181 59.237,55.181 61.737,55.181 69.237,55.181 71.737,55.181 74.237,55.181 76.737,55.181 84.237,55.181 86.737,55.181 89.237,55.181 40.139,55.617 23.785,55.743 46.411,55.746 66.215,55.796 26.697,55.907 27.797,55.907 28.896,55.888 41.2,55.907 42.3,55.907 43.4,55.907 63.785,56.238 23.785,56.843 26.215,56.896 66.215,56.896 43.751,56.949 7.987,57.681 10.487,57.681 12.987,57.681 15.487,57.681 17.987,57.681 20.487,57.681 30.487,57.681 32.987,57.681 35.487,57.681 37.987,57.681 40.487,57.681 50.487,57.681 52.987,57.681 55.487,57.681 57.987,57.681 60.487,57.681 70.487,57.681 72.987,57.681 75.487,57.681 77.987,57.681 80.487,57.681 82.987,57.681 6.737,60.181 9.237,60.181 11.737,60.181 14.237,60.181 16.737,60.181 19.237,60.181 29.237,60.181 31.737,60.181 34.237,60.181 36.737,60.181 39.237,60.181 49.237,60.181 51.737,60.181 54.237,60.181 56.737,60.181 59.237,60.181 69.237,60.181 71.737,60.181 74.237,60.181 76.737,60.181 79.237,60.181 81.737,60.181 84.237,60.181 89.237,60.181
  other v3: 80.25,50.675 79.175,51.75 81.3,51.75 80.25,52.825
INT1121: M1.15 M2.8 | length 51.6
  Top Layer w0.25: v2(24.75,44.5) M1.15 ; M2.8 68.362,44.012 v1(69.948,44.012)
  Bottom Layer w0.25: v2(24.75,44.5) 42.116,44.5 44.409,46.793 46.207,46.793 49,44 v1@70.007,44
MISO: M1.3 M2.2 | length 28.7
  Top Layer w0.25: M1.3 v2(45,42.5) ; v1(66.75,36.375) 68.155,36.375 M2.2
  Bottom Layer w0.25: v2(45,42.5) 51.25,36.25 58.89,36.25 59.015,36.375 v1(66.75,36.375)
MOSI: M1.4 M2.3 M3.4 | length 48.3
  Top Layer w0.25: M3.4 27.5,35.04 27.5,35.25 29.25,37 32.5,37 40,44.5 M1.4 v2(45,44.5) ; v1(66.75,37.5) 66.8,37.55 M2.3
  Bottom Layer w0.25: v2(45,44.5) 45,43.614 51.114,37.5 v1(66.75,37.5)
NetBZ1_2: BZ1.2 R14.1 | length 3.8
  Top Layer w0.25: R14.1 7.5,32.8 BZ1.2
NetC5_1: C5.1 U2.4 | length 2.5
  Top Layer w0.25: U2.4 79.05,39.95 79.25,39.75 C5.1
NetC6_1: C6.1 U3.4 | length 1.3
  Top Layer w0.25: C6.1 45.525,39.8 U3.4
NetC11_1: C11.1 R11.1 U4.6 | length 13.9
  Top Layer w0.25: U4.6 81.252,49.248 81.252,48.498 81.75,48 C11.1 84.25,47.925 84.25,46.75 84.5,46.5 87,46.5 87.5,47 87.5,50 86.75,50.75 R11.1
NetD1_1: D1.1 R1.2 | length 2.6
  Top Layer w0.25: R1.2@83.912,32 83.912,31.984 83.925,31.971 84.279,31.971 84.951,31.299 84.951,30.065 D1.1@84.996,30.02
NetD1_2: D1.2 U1.1 | length 6.8
  Top Layer w0.25: U1.1 80.3,28.55 80.5,28.75 84.5,28.75 84.804,28.446 84.804,27.676 D1.2
NetJP3_1: JP3.1 M1.9 | length 7.4
  Top Layer w0.8: M1.9 44.022,54.5 ccw(c44.02,55.3) 44.623,54.773 ccw(c42.595,56.539) 45,57.742 JP3.1
NetJP4_1: JP4.1 M1.10 | length 6.8
  Top Layer w0.8: JP4.1 25,55.5 ccw(c26.491,55.686) 25.292,54.781 25.338,54.734 ; 25.339,54.734 25.573,54.5 M1.10
NetJP5_1: JP5.1 M2.14 | length 9.9
  Top Layer w0.8: JP5.1 65,55.532 cw(c64.2,55.532) 64.984,55.372 ccw(c68.091,54.727) 67.983,51.555 M2.14@68.017,51.551 ; M2.14@68.017,51.551 68.019,51.55 M2.14
NetJP6_5: JP6.5 R13.1 | length 2
  Top Layer w0.25: R13.1 53.79,23.96 53.79,22.04 JP6.5
NetJP6_6: JP6.6 R12.1 | length 2
  Top Layer w0.25: R12.1 51.27,23.98 51.27,22.02 JP6.6
NetQ1_3: Q1.3 R5.2 | length 1.6
  Top Layer w0.25: Q1.3 R5.2
NetQ2_3: Q2.3 R14.2 | length 1.6
  Top Layer w0.25: R14.2 Q2.3
NetR3_2: R3.2 U1.5 | length 1.3
  Top Layer w0.25: R3.2 80.3,31.2 U1.5
NetR7_1: R7.1 U4.5 | length 2.1
  Top Layer w0.25: U4.5 80.75,48.25 81,48 R7.1
NetR8_1: R8.1 U4.4 | length 2.2
  Top Layer w0.25: R8.1 79.75,48 80.248,48.498 80.248,49.248 U4.4
NetR9_2: R9.2 U4.26 | length 1.9
  Top Layer w0.25: R9.2 76.75,51 77,51.25 U4.26
NetR10_2: R10.2 U4.25 | length 3.7
  Top Layer w0.25: R10.2 74.75,51.601 74.899,51.75 U4.25
NetR11_2: R11.2 U4.9 | length 1.5
  Top Layer w0.25: U4.9 R11.2
NRST: JP6.1 M2.17 | length 34.4
  Top Layer w0.25: M2.17 54.27,51.5 55.75,51.5 64,43.25 v1(64,30.75)
  Bottom Layer w0.25: JP6.1 64,22.01 v1(64,30.75)
NSS1121: M1.6 M2.11 | length 26.4
  Top Layer w0.25: M1.6 v2(45,48.5) ; v1(66.515,47.785) 68.175,47.785 M2.11
  Bottom Layer w0.25: v2(45,48.5) 45.75,47.75 66.48,47.75 v1(66.515,47.785)
OLED_CS: M2.4 M3.7 | length 37.4
  Top Layer w0.25: v1(66.75,38.75) 68.18,38.75 M2.4
  Bottom Layer w0.25: M3.7 35.192,35 35.942,35.75 67.354,35.75 67.5,35.896 67.5,38 v1(66.75,38.75)
OLED_DC: M2.24 M3.6 | length 28.7
  Top Layer w0.25: M3.6 33.87,36.25 36,36.25 36.75,35.5 51.25,35.5 52.75,37 52.75,42.5 53,42.75 54.13,42.75 M2.24
OLED_RST: M2.5 M3.5 | length 46.4
  Top Layer w0.25: M2.5 68.34,40 v1(69.5,40)
  Bottom Layer w0.25: M3.5 31.83,33.25 66.5,33.25 69.5,36.25 v1(69.5,40)
RST1121: M1.14 M2.10 | length 46.7
  Top Layer w0.25: v2(24.75,46.5) M1.14 ; v1(66.2,47.05) 66.2,46.961 66.721,46.44 M2.10
  Bottom Layer w0.25: v2(24.75,46.5) 43.48,46.5 44.223,47.243 65.4,47.243 65.526,47.117 66.133,47.117 v1(66.2,47.05)
RXD: M2.21 R9.1 R13.2 | length 54.5
  Top Layer w0.25: M2.21 54.44,46.25 56.104,46.25 56.177,46.323 56.25,46.396 ; R13.2 55.25,25.25 55.5,25.5 v1@57.75,25.5 ; v1(56.25,48.5) 56.25,46.396 ; v1(61.579,31.989) 61.579,32.084 61.7,32.205 61.7,40.8 56.25,46.25 56.25,46.396 ; v2(72.75,48) 75.75,48 76,48.25 R9.1
  Bottom Layer w0.25: v1(56.25,48.5) 72.25,48.5 v2(72.75,48) ; v1(57.698,25.512) 61.935,29.75 61.935,31.538 61.579,31.895 v1(61.579,31.989)
SCK: M1.5 M2.1 M3.3 | length 55.2
  Top Layer w0.25: M3.3 25.25,35 27.25,37 28.614,37 29.364,37.75 31.75,37.75 40.5,46.5 M1.5 44.631,46.5 44.963,46.168 v2(45.058,46.168) ; v1(65.75,38.5) 65.75,36.366 67.106,35.01 M2.1
  Bottom Layer w0.25: v2(45.058,46.168) 45.908,45.318 45.908,43.342 50.75,38.5 v1(65.75,38.5)
SWCLK: JP6.2 M2.30 | length 16
  Top Layer w0.25: M2.30 54.25,31.25 61.45,24.05 JP6.2
SWDIO: JP6.3 M2.29 | length 18
  Top Layer w0.25: M2.29 54.22,36.25 53.25,36.25 52.75,35.75 52.75,31.75 58.91,25.59 JP6.3
TXD: M2.18 R10.1 R12.2 | length 55.2
  Top Layer w0.25: R12.2 52.873,24.123 52.873,24.682 54.44,26.25 v1@56.75,26.25 ; M2.18 55.75,50.25 v1(56.125,49.875) 56.625,49.875 62.25,44.25 62.25,31.777 61.777,31.304 61.739,31.304 v1(61.198,30.762) ; v2(72.75,49) 73.25,49.5 R10.1
  Bottom Layer w0.25: v1(56.125,49.875) 57,49 v2(72.75,49) ; v1(56.698,26.262) v1@61.185,30.75
UP: M2.23 S1.2 | length 84.8
  Top Layer w0.25: M2.23 56.1,43.9 60.5,39.5 60.5,32.6 v1(59.898,31.998)
  Bottom Layer w0.25: S1.2 2.675,47.675 2.675,48.629 2.821,48.775 5.975,48.775 8,46.75 8,40.75 16.752,31.998 v1(59.898,31.998)
V_IN: C1.2 C2.2 C3.1 C4.1 D2.3 U2.1 U2.3 U3.1 | length 44.8
  Top Layer w0.25: U3.1 U3.1@48.725,42.175 ; C3.1@48.7,43.5 C3.1@48.75,43.5 ; C3.1@48.7,43.525 C3.1 ; C2.2@73.675,37.5 C2.2 ; U2.1@75.775,37.575 U2.1 ; C4.1@75.8,36.225 C4.1 78.225,36.175 D2.3 78.25,37 78.073,37.177 77.873,37.177 77.7,37.35 U2.3
  Top Layer w0.6: U3.1 48.7,43.5 C3.1@48.7,43.525 ; U3.1@48.725,42.175 C1.2 50.575,42.25 51.5,42.25 52.5,43.25 v2@52.5,46 ; v1(72.5,37.5) C2.2@73.675,37.5 ; C2.2 U2.1@75.775,37.575 ; C4.1@75.8,36.225 U2.1
  Bottom Layer w0.6: v2(52.5,46.125) 52.625,46.25 70.5,46.25 72.5,44.25 72.5,44 ; v1(72.5,37.5) 72.5,43.75
VBAT: BT1.1 D2.1 JP2.1 R5.1 U1.3 | length 31.3
  Top Layer w0.25: 79.645,25.355 79.855,25.355 79.875,25.375 ; JP2.1 JP2.1@81.418,22.082 ; BT1.1@81.418,10.332 BT1.1
  Top Layer w0.6: R5.1 78.75,27.5 ; 77.3,32.45 D2.1 ; 82.2,25.95 U1.3
  Top Layer w1: 77.3,32.45 78.75,31 78.75,27.5 78.75,26.25 79.645,25.355 ; 79.875,25.375 80.75,25.375 ; JP2.1 80.75,25.375 ; BT1.1@81.418,10.332 JP2.1@81.418,22.082 ; 82.2,25.95 81.625,25.375 80.75,25.375
VBUS: C12.2 D2.2 JP1.A4 JP1.A9 JP1.B4 JP1.B9 R1.1 U1.4 U4.7 U4.8 | length 36.2
  Top Layer w0.25: D2.2 D2.2@79.25,33.75 ; 81.15,37.4 JP1.A4 82.525,37.425 83.175,37.425 83.453,37.703 82.503,37.703 JP1.B9 ; U4.7 82.601,49.25 82.75,49.399 ; JP1.B4 82.75,42.55 83.342,42.55 83.664,42.228 ; JP1.A9 82.525,42.575 JP1.A9@82.75,42.575 ; U4.8 82.75,49.399 ; 83.639,42.203 83.775,42.067 84.933,42.067 84.765,42.235 83.671,42.235 ; C12.2 v1(83.5,49.5) 82.851,49.5 82.75,49.399 ; v1@85,42.156 v1(85,42.25)
  Top Layer w0.4: 83.453,37.703 83.7,37.95
  Top Layer w0.6: D2.2 79.2,35.45 81.15,37.4 ; D2.2@79.25,33.75 81.75,33.75 82.25,33.25 82.25,31.5 82.25,30.2 82.2,30.15 U1.4 ; 83.7,37.95 84.849,37.95 85.2,38.301 85.2,41.956 v1@85,42.156
  Bottom Layer w0.6: v1(83.5,49.5) 85,48 v1(85,42.25)
VCC: BZ1.1 C7.1 C9.2 C13.1 C14.1 JP6.7 M2.28 M3.2 U2.5 | length 118.4
  Top Layer w0.25: M2.28@54.25,37.5 M2.28
  Top Layer w0.6: BZ1.1 22.354,24.95 22.5,25.096 ; M3.2@22.5,35 22.5,25.096 ; M2.28@54.25,37.5 56,37.5 56.25,37.25 56.25,30.25 57,29.5 66.75,29.5 ; C7.1 75.8,41.475 U2.5 74.025,39.95 C9.2 73.566,39.491 72.491,39.491 71.5,38.5 71.5,34.25 66.75,29.5 ; 22.5,25.096 25.596,22 JP6.7 48.75,20.75 50,19.5 65,19.5 66.5,21 66.5,29.25 66.75,29.5
  Bottom Layer w0.6: M3.2 M3.2@22.48,34.98
VCC2: C8.1 C10.2 M1.1 U3.5 | length 9.8
  Top Layer w0.25: M1.1 M1.1@42.325,38.425
  Top Layer w0.6: M1.1@42.325,38.425 C8.1 45.6,38.525 48.7,38.525 U3.5 48.7,39.902 48.873,40.075 C10.2
pads on no net: JP1.1 JP1.A5 JP1.A8 JP1.B5 JP1.B8 JP1.MH M1.13 M1.16 M1.17 M2.16 M2.19 M2.20 S1.3 S2.3 S3.3 U4.1 U4.2 U4.10 U4.11 U4.12 U4.13 U4.14 U4.15 U4.16 U4.17 U4.18 U4.19 U4.20 U4.21 U4.22 U4.23 U4.24 U4.27 U4.28

## Polygon pours and split planes (outlines as drawn)
GND on Bottom Layer "GND_L02_P000" (solid, remove dead copper, pour order 0): 0,16 0,62 90,62 90,16
GND on Bottom Layer "GND_L02_P003" (solid, remove dead copper, pour order 3): -0.25,16.25 -0.25,0 0,-0.25 12.75,-0.25 12.75,16.25
GND on Bottom Layer "GND_L02_P002" (solid, remove dead copper, pour order 2): 83.5,16 83.5,0 90.25,0 90,0.25 90,16
GND on Top Layer "GND_L01_P001" (solid, remove dead copper, pour order 1): 0.127,15.946 0.127,61.696 0.377,61.946 90.127,61.946 90.127,15.946
GND on Top Layer "GND_L01_P006" (solid, remove dead copper, pour order 6): 83.5,16 83.5,0 90,0 90,16
GND on Top Layer "GND_L01_P005" (solid, remove dead copper, pour order 5): 0,16 0,0 12.75,0 12.75,16

## Keep-outs
Keep-Out Layer:
  the board outline again, w0.2

## Silkscreen, mask and mechanical layers (free items; w line width, h text height)
Top Overlay:
  text "MB" at 30.2,58.2 h1.2
  text "HB" at 50.2,58.2 h1.2
  text "LB" at 70.2,58.2 h1.2
  text "UP" at 5.8,49.2 h1 r90
  text "DOWN" at 5.55,38.2 h1 r90
  text "GND" at 20.3,29.95 h1.2 r90
  text "VCC" at 23.05,29.95 h1.2 r90
  text "SCK" at 25.55,29.95 h1.2 r90
  text "DAT" at 28.3,29.95 h1.2 r90
  text "RST" at 30.8,29.95 h1.2 r90
  text "DC" at 33.55,29.95 h1.2 r90
  text "CS" at 36.05,29.95 h1.2 r90
  text "+" at 83.05,20.217 h5
  text "LR_EVM v3.01." at 67.25,19.5 h2.5
  text "(c) GBL 2024" at 69.5,17.25 h2
  text "VCC" at 49.3,16.95 h1.2 r90
  text "TXD" at 51.8,16.95 h1.2 r90
  text "TXD" at 54.55,16.95 h1.2 r90
  text "GND" at 57.05,16.95 h1.2 r90
  text "DIO" at 59.55,16.95 h1.2 r90
  text "CLK" at 62.05,16.95 h1.2 r90
  text "RST" at 64.8,16.95 h1.2 r90
  text "OK" at 5.55,13.95 h1.2 r90
  text "+" at 84.8,8.217 h5
Bottom Overlay:
  text "+" at 83.05,20.217 h5
  text "+" at 84.8,8.217 h5

## Dimensions
0,0 to 3.5,62 on Mechanical 1
0,0 to 90,0 on Mechanical 1

## Text inside footprints (layer, text, board x,y; h text height)
BZ1: Top Overlay "+" at 4.65,23.95 h2 r270; Mechanical 7 "+" at 7.275,22.525 h0.9 r270; Mechanical 7 "BUZZER" at 10.25,26.5 h0.9 r90
D1: Top Overlay "+" at 84.25,32.75 h1.5 r270